# Altium PCB ZYNQ-HS-DEV-PCB.PcbDoc (part 4 of 10)
Units mm, origin at the board's own origin, x right, y up, seen from the top; angles counter-clockwise.
Board outline 125.25 x 111 mm, 10 copper layers (S1 (SIG), S2 (GND), S3 (SIG), S4 (GND), S5 (PWR), S6 (SIG), S7 (GND), S8 (SIG), S9 (GND), S10 (SIG)), stack 1.597 mm thick; 539 components, 408 nets, 2443 pads, 876 vias.
Unrouted connection lines stored in the file: 1310.
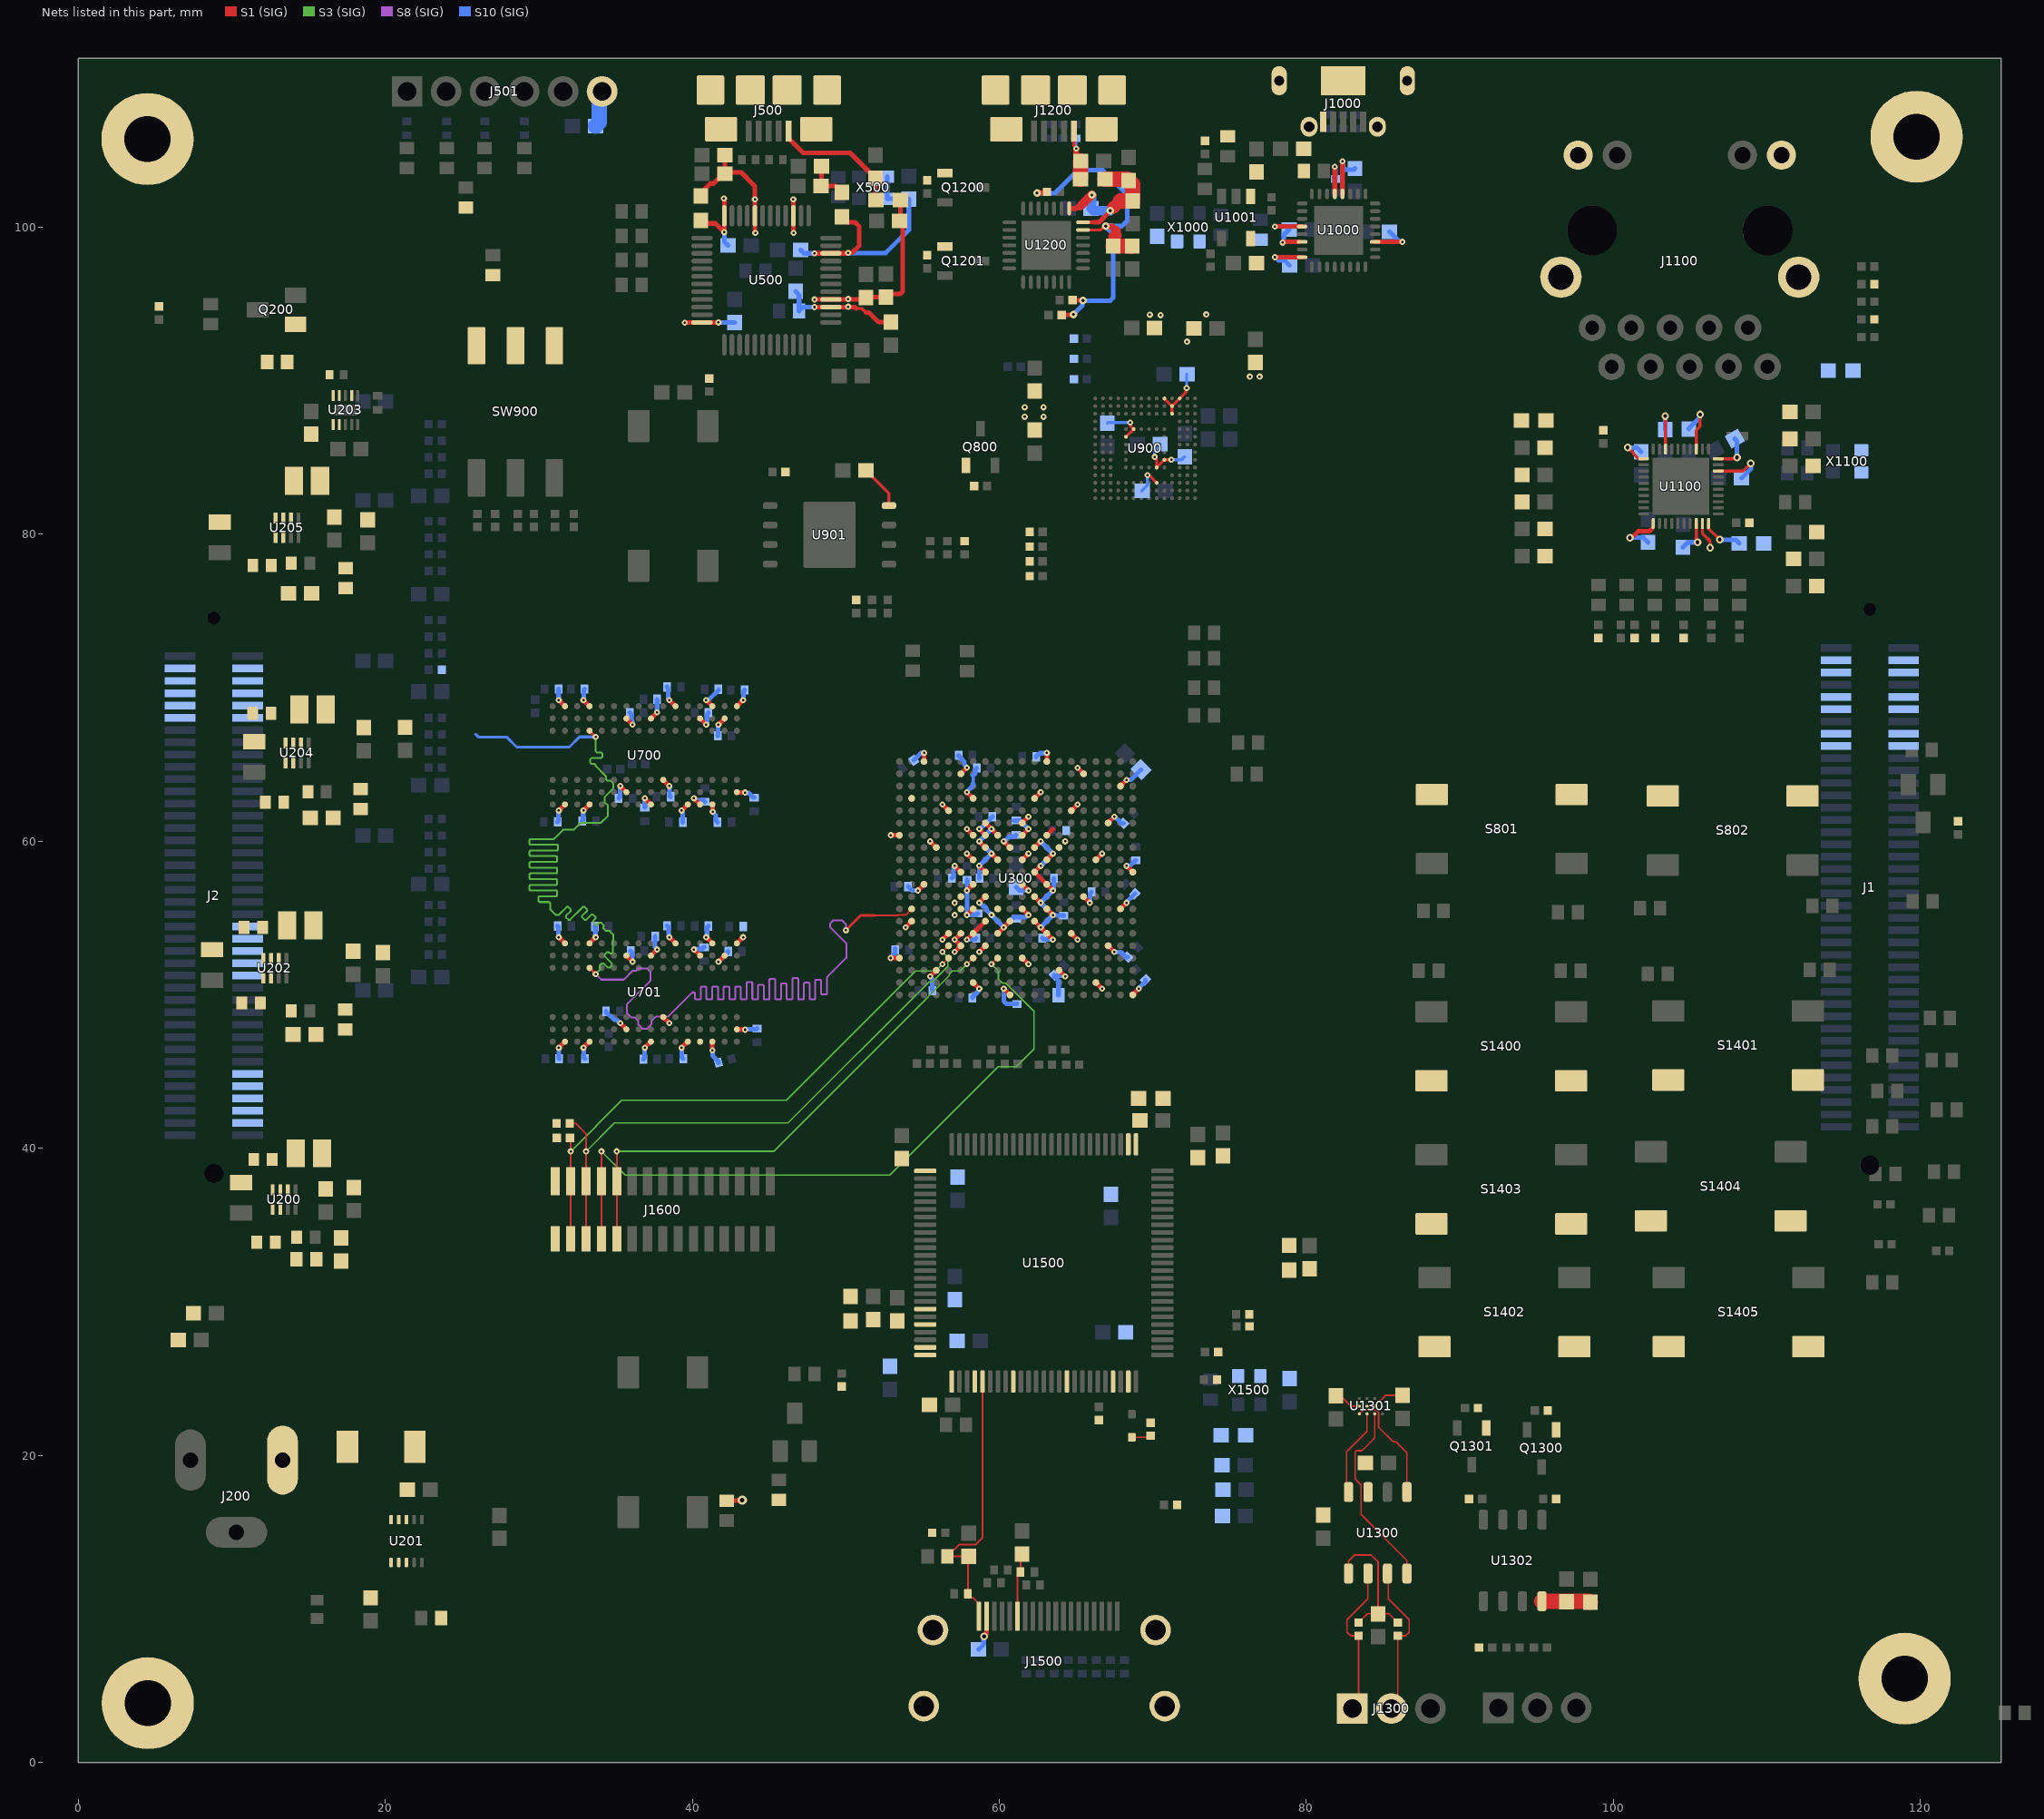
[diagram p8: the nets of this part, all layers, seen from the top]

## Via types
v1: diameter 0.4, hole 0.15, S1 (SIG) to S10 (SIG), tented both sides, 746 vias
v2: diameter 0.5, hole 0.25, S1 (SIG) to S10 (SIG), tented both sides, 108 vias
v3: diameter 0.5, hole 0.2, S1 (SIG) to S10 (SIG), tented both sides, 11 vias
v4: diameter 0.6, hole 0.3, S1 (SIG) to S10 (SIG), tented both sides, 10 vias
v5: diameter 0.45, hole 0.15, S1 (SIG) to S10 (SIG), tented both sides, 1 vias

## Nets (pads, with @x,y where several pads share a name; then routed paths per layer and width w, separated by ;. In a path a pad name is that pad's centre, name@x,y a point inside that pad or via, vN(x,y) a via of type N, cw(c..) or ccw(c..) an arc to the next point about the centre after c; other vN are vias at no path point) (continued)
+5V_UART: (continued)
  S1 (SIG) w0.25: U1200.7@65.45,100.325 66.15,100.325
  S1 (SIG) w0.3: 66.15,100.325 66.494,100.325 v3@67.225,101.056
  S1 (SIG) w0.35: 64.675,101.225 65.001,101.225 65.101,101.325 65.164,101.325
  S1 (SIG) w0.45: 65.164,101.325 65.238,101.325 65.388,101.475
  S1 (SIG) w0.6: 65.388,101.475 66.013,102.1 v3(66.025,102.1)
  S1 (SIG) w0.8: 67.425,101.3 67.45,101.3 67.875,101.725
  S1 (SIG) w1: FB1200.2@66.875,103.125 68.35,103.125 C1205.2@68.425,103.05 68.675,102.8 C1200.2@68.675,101.725 67.875,101.725
  S10 (SIG) w0.6: v3(66.025,102.1) 66.025,101.275 C1201.2@65.975,101.225 66.125,101.075 v3(67.225,101.075)
+PWRIN: D200.A J200.1
+REGOUT_ETH: L1100.1 U1100.30 | length 2.7
  S1 (SIG) w0.2: U1100.30@106.2,80.7 106.2,80.375 v2(106.925,79.65)
  S10 (SIG) w0.3: v2(106.925,79.65) 107.95,79.65 L1100.1@108.2,79.4
+VBUS_UART: C1204.2 D1200.2 FB1200.1 J1200.1 | length 4
  S1 (SIG) w0.2: J1200.1@64.85,106.262 64.85,105.329 65,105.179 v1(65,105.125)
  S1 (SIG) w0.4: v1(65,105.125) 65,104.6 65.275,104.325 C1204.2@65.3,104.325
  S1 (SIG) w1: FB1200.1@65.275,103.125 65.275,104.3 C1204.2@65.3,104.325
  S10 (SIG) w0.2: D1200.2@64.981,105.793 64.99,105.783 64.99,105.135 v1(65,105.125)
+VCC: C204.2 D200.C J2.3 J2.4 J2.5 J2.6 J2.7 J2.8 J2.9 J2.10 J2.11 J2.12 R203.1 U201.3 U201.4 U201.5
+VPHY_FTDI: C502.2 C503.2 C504.2 C505.2 FB501.1 FB502.1 U500.3 U500.8 | length 13.7
  S1 (SIG) w0.3: FB501.1@40.55,102.2 40.55,102.225 41.175,102.85 41.375,102.85 42.1,103.575 C502.2@42.125,103.575 ; C503.2@42.125,104.675 C502.2@42.125,103.575 ; v1(44.1,99.625) 44.1,99.652 44.075,99.677 U500.8@44.075,100.75 v1(44.075,101.823) 44.056,101.842 44.056,102.694 43.175,103.575 C502.2@42.125,103.575 ; v1(46.575,101.823) U500.3@46.575,100.75 46.575,99.677 46.6,99.652 v1(46.6,99.625) ; C504.2@48.4,103.975 48.4,102.725 C505.2@48.375,102.7 49.35,102.7 49.75,102.3 FB502.1@49.75,102.275
+VUSB_FTDI: C506.2 FB500.1 J500.1 | length 8.6
  S1 (SIG) w0.3: J500.1@46.275,106.262 46.275,105.787 47.213,104.85 50.275,104.85 51.575,103.55 51.6,103.55 51.925,103.225 C506.2@51.925,103.2 51.925,101.8 FB500.1@51.95,101.775
+VUSB_OTG: C1005.2 C1006.2 J1000.1 R1000.2 U1001.1
C_HEAC_N: C1518.2 D1506.2 J1500.19 R1505.2 U1500.30 | length 18.6
  S1 (SIG) w0.11: D1506.2@57.95,10.925 58.145,10.73 58.258,10.73 58.675,10.313 J1500.19@58.675,9.513 ; D1506.2@57.95,10.975 57.95,13.375 C1518.2@58,13.425 57.95,13.425 R1505.2@56.625,13.425 56.625,13.5 56.97,13.845 57.045,13.845 57.375,14.175 58.45,14.175 58.9,14.625 U1500.30@58.9,24.8
C_HEAC_P: C1519.2 D1503.2 J1500.14 | length 4.2
  S1 (SIG) w0.11: J1500.14@61.175,9.513 61.175,12.15 61.375,12.35 61.375,13.475 C1519.2@61.475,13.575
CAM_CLK: J1600.12 J1600.12_1 U300.U9 | length 45.3
  S1 (SIG) w0.11: J1600.12_1@34.075,34.1 J1600.12@34.075,37.85 v1(34.075,39.8) ; v1(59.488,51.995) U300.U9@59.888,52.395
  S3 (SIG) w0.1: v1(34.075,39.8) 35.625,38.25 52.85,38.25 59.925,45.325 61.1,45.325 62.25,46.475 62.25,48.45 62.25,48.927 60.433,50.745 60.223,50.745 59.938,51.03 59.938,51.545 v1(59.488,51.995)
CAM_GPIO: J1600.11 J1600.11_1 U300.U7 | length 34.2
  S1 (SIG) w0.11: J1600.11_1@35.075,34.1 J1600.11@35.075,37.85 v1(35.075,39.8) ; v1(57.888,51.995) U300.U7@58.288,52.395
  S3 (SIG) w0.1: v1(35.075,39.8) 45.3,39.8 53.95,48.45 56.738,51.238 56.738,51.34 56.943,51.545 57.438,51.545 v1(57.888,51.995)
CAM_SCL: J1600.13 J1600.13_1 R1605.1 U300.T5 | length 38.4
  S1 (SIG) w0.11: R1605.1@32.009,41.624 32.401,41.624 33.075,40.95 v1(33.075,39.8) J1600.13@33.075,37.85 J1600.13_1@33.075,34.1 ; v1(56.288,52.795) U300.T5@56.688,53.195
  S3 (SIG) w0.1: v1(33.075,39.8) 34.925,41.65 46.225,41.65 55.42,50.845 55.633,50.845 56.638,51.85 56.638,52.063 56.638,52.445 v1(56.288,52.795)
CAM_SDA: J1600.14 J1600.14_1 R1604.1 U300.U5 | length 36.4
  S1 (SIG) w0.11: R1604.1@32.025,40.675 32.075,40.625 v1(32.075,39.8) J1600.14@32.075,37.85 J1600.14_1@32.075,34.1 ; v1(56.288,51.995) U300.U5@56.688,52.395
  S3 (SIG) w0.1: v1(32.075,39.8) 35.4,43.125 46.123,43.125 54.543,51.545 55.838,51.545 v1(56.288,51.995)
CAN_CAN_H: J1300.2 R1300.1 U1300.7 | length 10.1
  S1 (SIG) w0.1: U1300.7@85.34,12.3 85.34,10.66 86.7,9.3 86.7,8.475 86.475,8.25 R1300.1@85.95,8.25 85.95,3.905 J1300.2@86.355,3.5
CAN_CAN_L: J1300.1 R1301.1 U1300.6 | length 10.1
  S1 (SIG) w0.1: J1300.1@82.995,3.5 83.4,3.905 R1301.1@83.4,8.25 82.875,8.25 82.65,8.475 82.65,9.3 84.01,10.66 U1300.6@84.01,12.3
CAN_RX: U1300.4 U1301.B1 | length 5.7
  S1 (SIG) w0.1: U1300.4@82.74,17.6 82.625,17.715 82.625,20.224 83.95,21.549 U1301.B1@83.95,22.7
CAN_SPLIT: C1304.2 R1300.2 R1301.2 U1300.5 | length 9.5
  S1 (SIG) w0.1: U1300.5@82.74,12.3 82.74,13.115 83.125,13.5 84.225,13.5 84.675,13.05 C1304.2@84.675,9.675 ; R1301.2@83.4,9.1 83.975,9.675 C1304.2@84.675,9.675 ; R1300.2@85.95,9.1 85.375,9.675 C1304.2@84.675,9.675
CAN_STB: U1300.8 U1301.C1 | length 12.6
  S1 (SIG) w0.1: U1301.C1@84.45,22.7 84.45,21.125 83.625,20.3 83.234,20.3 83.175,20.241 83.175,18.45 83.56,18.065 83.56,16.14 86.55,13.15 U1300.8@86.55,12.3
CAN_TX: U1300.1 U1301.A1 | length 7.5
  S1 (SIG) w0.1: U1301.A1@83.45,22.7 83.7,22.95 84.554,22.95 84.7,22.804 84.7,21.825 85.65,20.875 85.837,20.875 86.55,20.162 U1300.1@86.55,17.6
CEC_DIO: D1500.A R1500.1 | length 1.3
  S1 (SIG) w0.11: D1500.A@68.625,21.175 69.75,21.175 R1500.1@69.85,21.275
CHASSIS: C357.2 J500.SH J1000.SH J1100.SH J1200.SH J1500.S1 J1500.S2 J1500.S3 J1500.S4 pad.2 R300.1
DDR_A0: R600.2 U300.N2 U700.N3 U701.N3 | length 113.7
  S1 (SIG) w0.11: 51.9,55.175 53.375,55.175 53.395,55.195 53.888,55.195 U300.N2@54.288,55.595
  S1 (SIG) w0.18: U701.N3@33.3,51.75 v1(33.7,51.35) ; U700.N3@33.3,67.2 v1(33.7,66.8) ; v1(50,54.2) 50.975,55.175 51.9,55.175
  S3 (SIG) w0.119: v1(33.7,51.35) 33.95,51.6 33.992,51.642 33.992,51.748 33.952,51.788 33.952,51.893 34.11,52.052 34.216,52.052 34.505,51.762 34.611,51.762 34.769,51.921 34.769,52.026 34.281,52.515 34.281,52.62 34.439,52.779 34.544,52.779 34.645,52.678 34.75,52.678 34.825,52.753 34.825,52.862 34.825,53.566 34.86,53.601 34.86,53.899 34.629,54.129 34.587,54.171 34.482,54.171 34.473,54.162 34.367,54.162 34.209,54.321 34.209,54.426 34.218,54.435 34.218,54.541 34.059,54.699 33.954,54.699 33.814,54.56 33.709,54.56 33.55,54.718 33.55,54.824 33.69,54.963 33.69,55.069 33.532,55.227 33.426,55.227 33.086,54.886 32.98,54.886 32.822,55.045 32.822,55.15 33.132,55.46 33.132,55.566 32.973,55.724 32.868,55.724 32.03,54.886 31.924,54.886 31.766,55.045 31.766,55.15 32.076,55.46 32.076,55.566 31.918,55.724 31.812,55.724 31.288,55.2 31.108,55.2 31.062,55.246 30.741,55.567 30.741,55.865 30.741,55.925 ccw(c30.622,55.925) 30.622,56.044 30.056,56.044 cw(c30.056,56.119) 29.981,56.119 29.981,56.342 cw(c30.056,56.342) 30.056,56.417 31.121,56.417 ccw(c31.121,56.492) 31.196,56.492 31.196,56.716 ccw(c31.121,56.716) 31.121,56.79 29.469,56.79 cw(c29.469,56.865) 29.394,56.865 29.394,57.089 cw(c29.469,57.089) 29.469,57.163 31.12,57.163 ccw(c31.12,57.238) 31.194,57.238 31.194,57.462 ccw(c31.12,57.462) 31.12,57.537 29.469,57.537 cw(c29.469,57.611) 29.394,57.611 29.394,57.835 cw(c29.469,57.835) 29.469,57.91 31.118,57.91 ccw(c31.118,57.984) 31.193,57.984 31.193,58.208 ccw(c31.118,58.208) 31.118,58.283 29.469,58.283 cw(c29.469,58.358) 29.394,58.358 29.394,58.582 cw(c29.469,58.582) 29.469,58.656 31.117,58.656 ccw(c31.117,58.731) 31.192,58.731 31.192,58.955 ccw(c31.117,58.955) 31.117,59.029 29.469,59.029 cw(c29.469,59.104) 29.394,59.104 29.394,59.328 cw(c29.469,59.328) 29.469,59.403 31.173,59.403 ccw(c31.173,59.477) 31.247,59.477 31.247,59.701 ccw(c31.173,59.701) 31.173,59.776 29.469,59.776 cw(c29.469,59.85) 29.394,59.85 29.394,60.074 cw(c29.469,60.074) 29.469,60.149 30.931,60.149 ccw(c30.931,60.268) 31.015,60.184 31.424,60.593 31.595,60.764 32.302,60.764 32.741,61.202 34.031,61.202 34.498,61.669 34.498,62.331 34.279,62.55 34.279,62.87 34.86,63.451 34.86,63.749 34.649,63.96 34.445,63.96 34.375,64.029 34.375,64.234 33.7,64.909 33.7,64.968 33.625,65.043 33.428,65.043 33.354,65.117 33.354,65.341 33.428,65.416 34.05,65.416 34.125,65.491 34.125,65.715 34.05,65.789 33.775,65.789 33.7,65.864 33.7,66.276 v1(33.7,66.8)
  S8 (SIG) w0.119: v1(33.7,51.35) 34.06,50.99 35.538,50.99 36.119,51.571 36.34,51.571 36.478,51.71 37.049,51.71 37.26,51.499 37.26,50.91 35.74,49.39 35.74,48.801 36.005,48.537 36.222,48.537 36.486,48.272 36.486,48.055 36.751,47.79 37.049,47.79 37.34,48.082 37.34,48.299 37.632,48.59 38.432,48.59 39.703,49.861 39.97,50.128 cw(c40.054,50.044) 40.173,50.044 40.173,49.769 ccw(c40.248,49.769) 40.248,49.694 40.472,49.694 ccw(c40.472,49.769) 40.546,49.769 40.546,50.463 cw(c40.621,50.463) 40.621,50.538 40.845,50.538 cw(c40.845,50.463) 40.919,50.463 40.919,49.769 ccw(c40.994,49.769) 40.994,49.694 41.218,49.694 ccw(c41.218,49.769) 41.293,49.769 41.293,50.463 cw(c41.367,50.463) 41.367,50.538 41.591,50.538 cw(c41.591,50.463) 41.666,50.463 41.666,49.769 ccw(c41.74,49.769) 41.74,49.694 41.964,49.694 ccw(c41.964,49.769) 42.039,49.769 42.039,50.463 cw(c42.114,50.463) 42.114,50.538 42.338,50.538 cw(c42.338,50.463) 42.412,50.463 42.412,49.769 ccw(c42.487,49.769) 42.487,49.694 42.711,49.694 ccw(c42.711,49.769) 42.785,49.769 42.785,50.463 cw(c42.86,50.463) 42.86,50.538 43.084,50.538 cw(c43.084,50.463) 43.159,50.463 43.159,49.769 ccw(c43.233,49.769) 43.233,49.694 43.457,49.694 ccw(c43.457,49.769) 43.532,49.769 43.532,50.761 cw(c43.606,50.761) 43.606,50.836 43.83,50.836 cw(c43.83,50.761) 43.905,50.761 43.905,49.769 ccw(c43.98,49.769) 43.98,49.694 44.204,49.694 ccw(c44.204,49.769) 44.278,49.769 44.278,50.571 cw(c44.353,50.571) 44.353,50.646 44.577,50.646 cw(c44.577,50.571) 44.651,50.571 44.651,49.769 ccw(c44.726,49.769) 44.726,49.694 44.95,49.694 ccw(c44.95,49.769) 45.025,49.769 45.025,50.962 cw(c45.099,50.962) 45.099,51.037 45.323,51.037 cw(c45.323,50.962) 45.398,50.962 45.398,49.769 ccw(c45.472,49.769) 45.472,49.694 45.696,49.694 ccw(c45.696,49.769) 45.771,49.769 45.771,50.669 cw(c45.846,50.669) 45.846,50.743 46.069,50.743 cw(c46.069,50.669) 46.144,50.669 46.144,49.769 ccw(c46.219,49.769) 46.219,49.694 46.443,49.694 ccw(c46.443,49.769) 46.517,49.769 46.517,51.019 cw(c46.592,51.019) 46.592,51.094 46.816,51.094 cw(c46.816,51.019) 46.89,51.019 46.89,49.769 ccw(c46.965,49.769) 46.965,49.694 47.189,49.694 ccw(c47.189,49.769) 47.264,49.769 47.264,50.714 cw(c47.338,50.714) 47.338,50.789 47.562,50.789 cw(c47.562,50.714) 47.637,50.714 47.637,49.769 ccw(c47.711,49.769) 47.711,49.694 47.935,49.694 ccw(c47.935,49.769) 48.01,49.769 48.01,50.91 cw(c48.085,50.91) 48.085,50.984 48.309,50.984 cw(c48.309,50.91) 48.383,50.91 48.383,50.097 ccw(c48.458,50.097) 48.458,50.022 48.682,50.022 ccw(c48.682,50.097) 48.756,50.097 48.756,51.082 cw(c48.876,51.082) 48.791,51.166 49.165,51.54 50.025,52.4 50.025,53.35 48.975,54.4 48.975,54.65 49.171,54.846 49.754,54.846 50,54.6 v1(50,54.2)
  S10 (SIG) w0.18: 25.875,66.975 26.058,66.792 27.891,66.792 28.553,66.13 31.982,66.13 32.652,66.8 v1(33.7,66.8)